# EAGLE board charger_v3 (EAGLE 9.6.1)
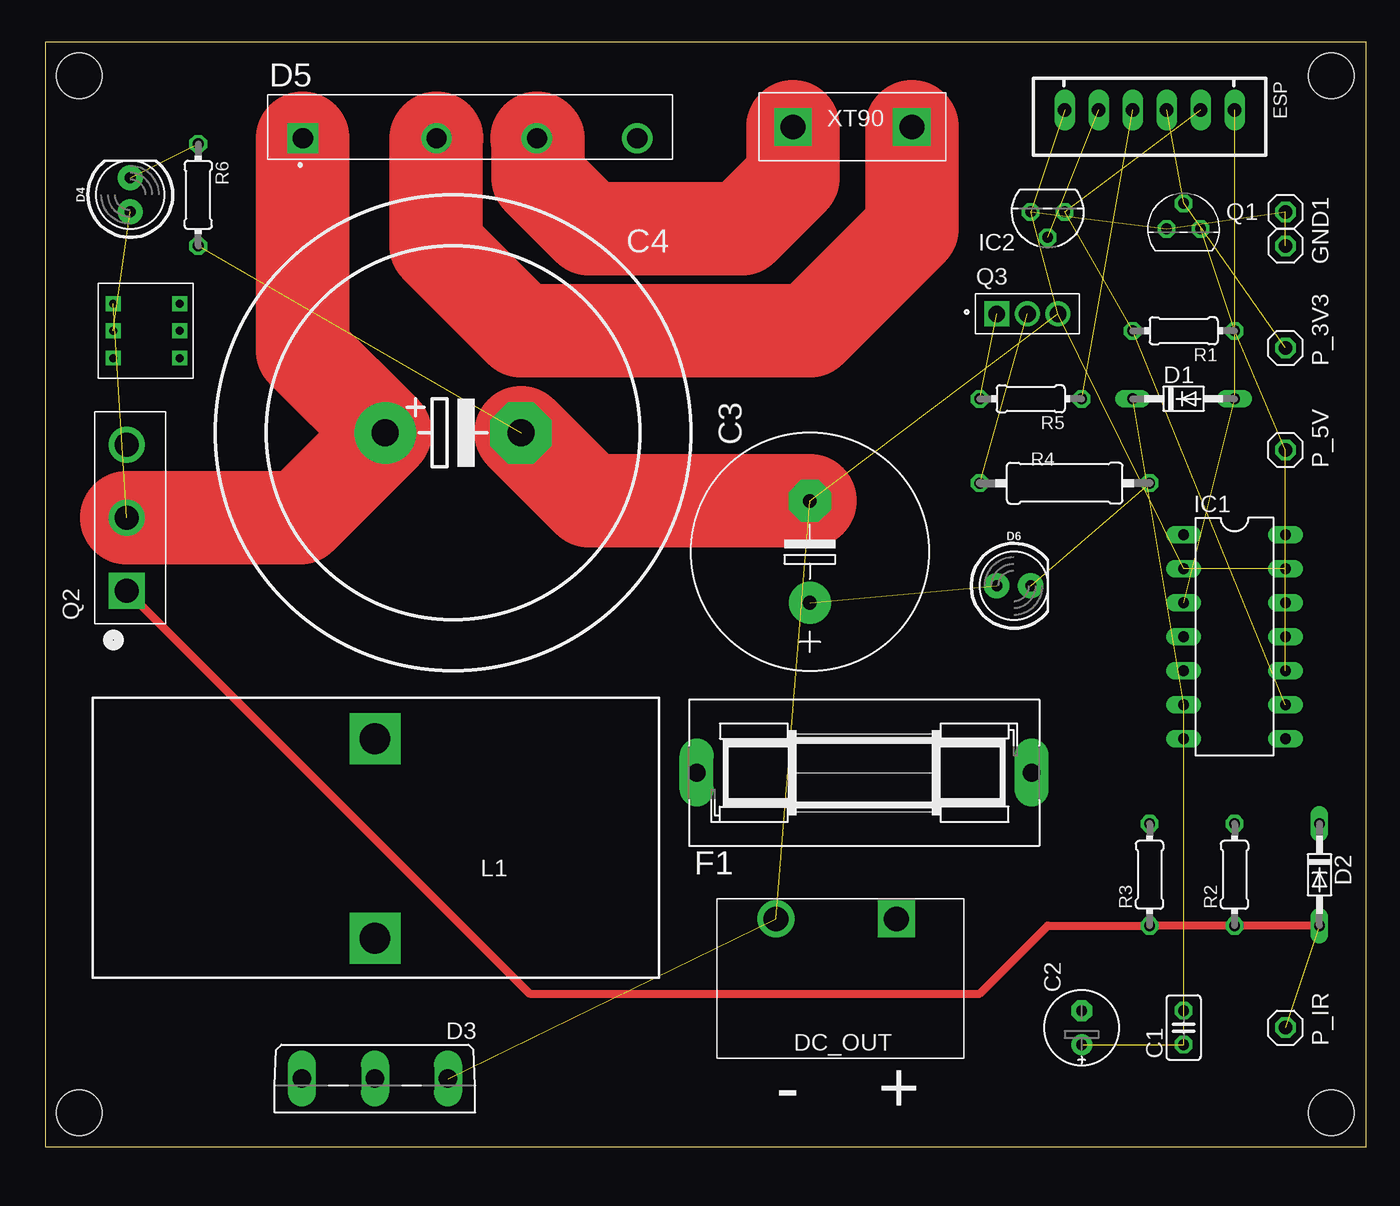
[diagram p0: board, top side]
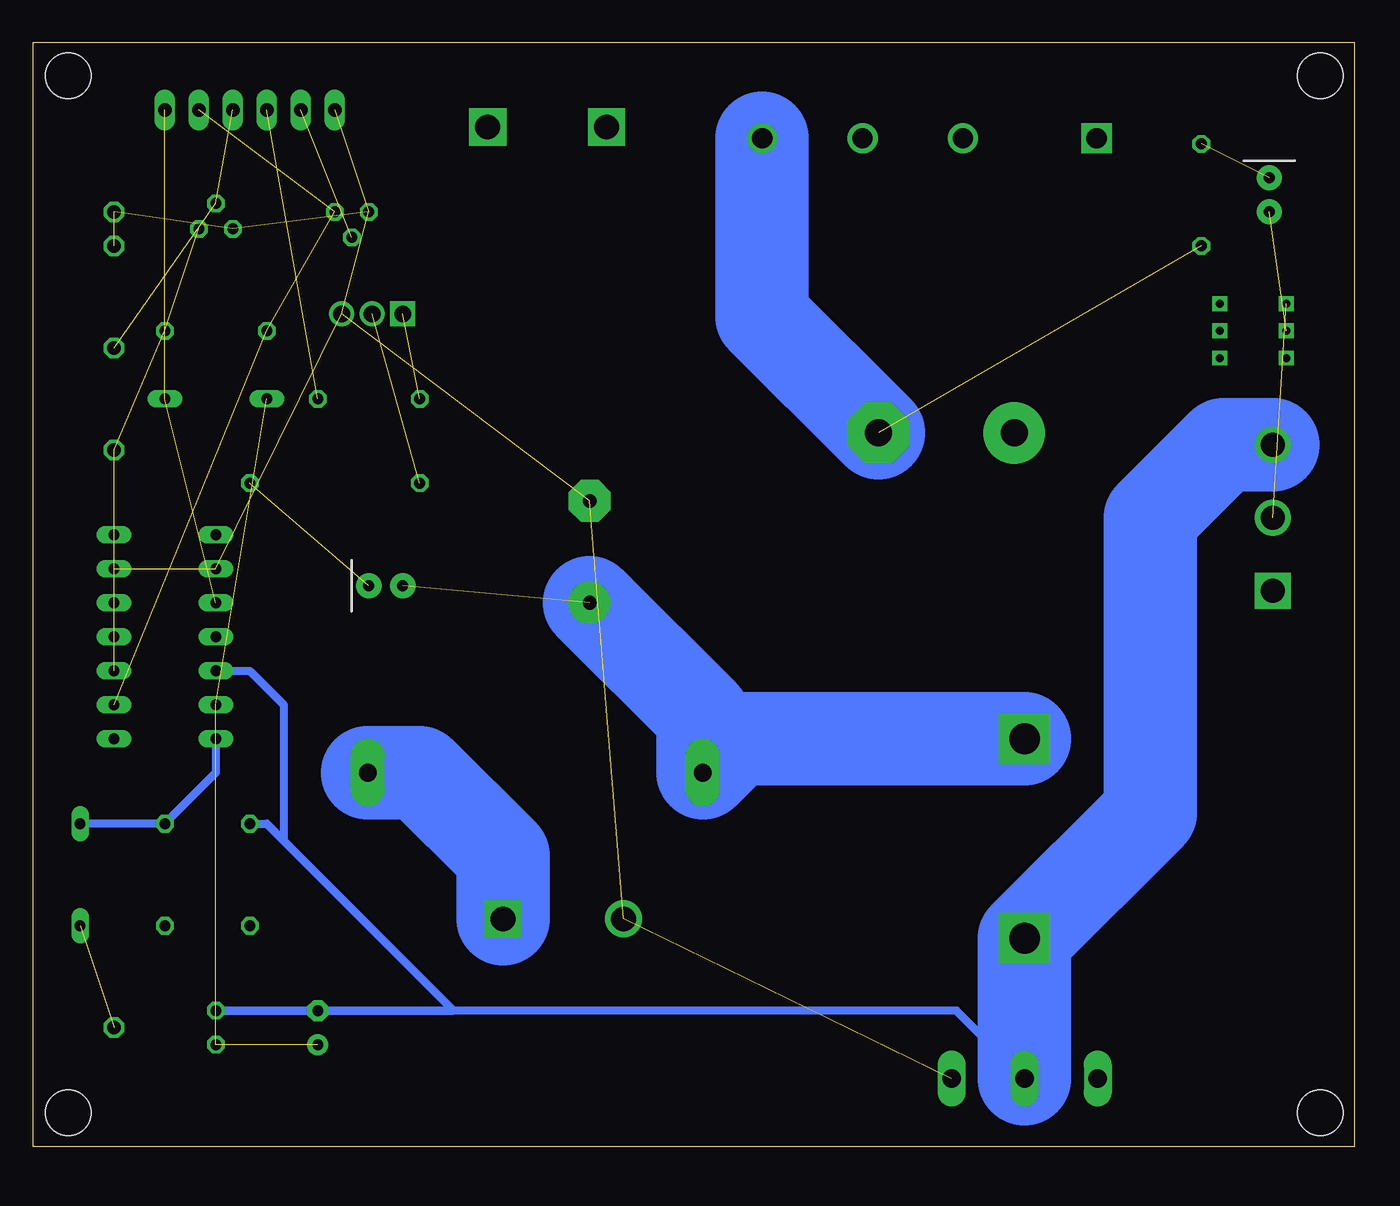
[diagram p1: board, bottom side, seen from below]

Size 98.73 x 82.54 mm. Coordinates in mm from the lower left corner, seen from the top.
Outline: 0,0 98.73,0 98.73,82.54 0,82.54 0,0
Copper layers (1*16): Top 0.035mm / dielectric 1.5mm / Bottom 0.035mm
Design rules "default *": minimum track width 12mil, minimum drill 0.35mm, track to track 12mil, track to pad 12mil, pad to pad 12mil, via to via 12mil, smd to smd 12mil, copper to edge 40mil, drill to drill 6mil, minimum pad ring 10mil, minimum via ring 8mil, stop-mask expansion 4mil, vias tented up to drill 0mil, thermal gap 10mil
Net classes: 0 default: width 0.305 mm; 1 power: width 6.985 mm, clearance 0.508 mm to class 0; 2 pwm_12: width 0.305 mm, clearance 0.508 mm to class 0, clearance 0.508 mm to class 1
Holes 3.4 mm at 2.54,80.01 96.14,80.01 2.54,2.54 96.14,2.54

## Footprints (pad centres in the part's own frame; a part is rotated, then mirrored left to right if it is on the bottom)
XT90-PAD = drill 1.854 square: P$1 0,5.08; P$2 0,-3.81
C025-025X050 = drill 0.813 octagon: 1 -1.27,0; 2 1.27,0
E2,5-6E = drill 0.813 pad 1.575: + -1.27,0 | drill 0.813 pad 1.575 octagon: - 1.27,0
E7,5-18 = drill 1.016 pad 3.15: + -3.81,0 | drill 1.016 pad 3.15 octagon: - 3.81,0
EB35D = drill 2.007 pad 4.597: + -5.08,0 | drill 2.007 pad 4.597 octagon: - 5.08,0
DO34-7 = drill 0.813 long: A 3.81,0; C -3.81,0
SOT93S = drill 1.397 long: A1 -5.461,-2.54; A2 5.461,-2.54; C 0,-2.54
LED_5MM = drill 0.813 pad 1.88: A -1.27,0; K 1.27,0
DIOB_GBJ3510-BP = drill 1.51 pad 2.27 square: 1 -12.5,-0.85 | drill 1.51 pad 2.27: 2 -2.5,-0.85; 3 5,-0.85; 4 12.5,-0.85
TE_1977477-2 = drill 1.85 square: 1 -3.241,-5.334 | drill 1.85: 2 5.781,-5.334
JST-XH-06-PACKAGE-LONG-PAD = drill 1.016 long: 1 -6.35,0; 2 -3.81,0; 3 -1.27,0; 4 1.27,0; 5 3.81,0; 6 6.35,0
SH25 = drill 1.321 pad 2.54 long: 1 -12.522,0; 2 12.522,0
1X01 = drill 1.016 octagon: 1 0,0
DIL14 = drill 0.813 long: 1 -7.62,-3.81; 2 -5.08,-3.81; 3 -2.54,-3.81; 4 0,-3.81; 5 2.54,-3.81; 6 5.08,-3.81; 7 7.62,-3.81; 8 7.62,3.81; 9 5.08,3.81; 10 2.54,3.81; 11 0,3.81; 12 -2.54,3.81; 13 -5.08,3.81; 14 -7.62,3.81
TO92 = drill 0.813 octagon: 1 -1.27,0; 2 0,1.905; 3 1.27,0
TJ7-U1 = drill 2.286 pad 3.81 square: 1 -6.503,4.826; 2 8.408,4.826
TO247AC = drill 1.79 pad 2.69 square: 1 -5.46,0.255 | drill 1.79 pad 2.69: 2 0,0.255; 3 5.46,0.255
TO229P780X300X1364-3 = drill 1.25 square: 1 0,0 | drill 1.25: 2 2.29,0; 3 4.58,0
0204/7 = drill 0.813 octagon: 1 -3.81,0; 2 3.81,0
0309/12 = drill 0.813 octagon: 1 -6.35,0; 2 6.35,0
TL-2230 = drill 0.6 square: 1 -2.032,-2.54; 2 0,-2.54; 3 2.032,-2.54; 4 -2.032,2.413; 5 0,2.413; 6 2.032,2.413

## Placement (x,y rotation side)
AC_IN  XT90A  [XT90-PAD]  59.69,76.2 270 top
C1  100nF  [C025-025X050]  85.09,8.89 90 top
C2  22uF  [E2,5-6E]  77.47,8.89 90 top
C3  150uF  [E7,5-18]  57.15,44.45 90 top
C4  470uF  [EB35D]  30.48,53.34 0 top
D1  UF4007  [DO34-7]  85.09,55.88 0 top
D2  UF4007  [DO34-7]  95.25,20.32 270 top
D3  PBYR3035  [SOT93S]  24.64,2.54 180 top
D4  [LED_5MM]  6.35,71.12 90 top
D5  GBJ3510-BP  [DIOB_GBJ3510-BP]  31.75,76.2 0 top
D6  [LED_5MM]  72.39,41.91 0 top
DC_OUT  1977477-2  [TE_1977477-2]  60.39,11.68 180 top
ESP  JST-XH-06-PIN-LONG-PAD  [JST-XH-06-PACKAGE-LONG-PAD]  82.55,77.47 180 top
F1  [SH25]  61.21,27.94 0 top
GND1  [1X01]  92.71,67.31 0 top
GND2  [1X01]  92.71,69.85 0 top
IC1  IR2110D  [DIL14]  88.9,38.1 270 top
IC2  LM35CZ  [TO92]  74.93,69.85 180 top
L1  1mH  [TJ7-U1]  29.46,22.07 90 top
P_3V3  [1X01]  92.71,59.69 90 top
P_5V  [1X01]  92.71,52.07 90 top
P_IR  [1X01]  92.71,8.89 90 top
Q1  2N7000  [TO92]  85.09,68.58 0 top
Q2  IRFP240  [TO247AC]  6.35,46.99 90 top
Q3  MJE13003G  [TO229P780X300X1364-3]  71.12,62.23 0 top
R1  10k  [0204/7]  85.09,60.96 180 top
R2  10  [0204/7]  88.9,20.32 90 top
R3  1k  [0204/7]  82.55,20.32 90 top
R4  68k  [0309/12]  76.2,49.58 0 top
R5  2.7k  [0204/7]  73.66,55.88 180 top
R6  10k  [0204/7]  11.43,71.12 270 top
U$1  SWITCH-DPDT-7X7A  [TL-2230]  7.62,60.96 270 top

## Library data of the parts
AC_IN U$1 = TA_library
C1-C4 = rcl; SPICEPREFIX: C
D1-D3 = diode
D4 D6 = Sparkfun_LED
D5 = GBJ3510-BP; AVAILABILITY: In Stock; DESCRIPTION: Bridge Rectifier Single Phase Standard 1 kV Through Hole GBJ; MF: Micro Commercial; MP: GBJ3510-BP; PACKAGE: SIP-4 Micro Commercial Co; PRICE: None; PURCHASE-URL: https://pricing.snapeda.com/search/part/GBJ3510-BP/?ref=eda
DC_OUT = terminal_block_TA; AVAILABILITY: In Stock; COMMENT: 1977477-2; DESCRIPTION: Conn Barrier Strip 2 POS 8.25mm Solder ST Thru-Hole 15A/Contact Carton; MF: TE Connectivity; MP: 1977477-2; PACKAGE: None; PRICE: None; PURCHASE-URL: https://pricing.snapeda.com/search/part/1977477-2/?ref=eda
ESP = Rembrandt Electronics - JST XH Connectors v1-0
F1 = fuse; MF: SCHURTER; MPN: 0031.8211; OC_FARNELL: 1162741; OC_NEWARK: 96B9380
GND1 GND2 P_3V3 P_5V P_IR = pinhead
IC1 = irs
IC2 = lm35
L1 = custom_inductor; SPICEPREFIX: L
Q1 = 2N7000; AVAILABILITY: In Stock; DESCRIPTION: N-Channel 60V 350mA (Tc) 1W (Tc) Through Hole TO-92-3; MF: STMicroelectronics; MP: 2N7000; PACKAGE: E-PKG AXIAL-LEADED-2 ON Semiconductor; PRICE: None
Q2 = IRFP240(TO-247); AVAILABILITY: In Stock; DESCRIPTION: N-Channel 200 V 20A (Tc) 150W (Tc) Through Hole TO-247AC; MF: Vishay Siliconix; MP: IRFP240; PACKAGE: TO-247 Vishay Siliconix; PRICE: None
Q3 = MJE13003G; AVAILABILITY: Not in stock; DESCRIPTION: Bipolar (BJT) Transistor NPN 400 V 1.5 A 10MHz 1.4 W Through Hole TO-126; MF: ON Semiconductor; MP: MJE13003G; PACKAGE: TO-126 ON Semiconductor; PRICE: None
R1-R6 = rcl; SPICEPREFIX: R

## Nets
5V: ESP.2 IC1.9 IC2.1 R1.2
12V: D1.A ESP.1 IC1.3
AC_1 [power]: AC_IN.P$1 D5.2
AC_2 [power]: AC_IN.P$2 D5.3
GND: C3.- C4.- D3.A1 D5.4 DC_OUT.2 ESP.6 GND1.1 GND2.1 IC1.2 IC1.11 IC1.12 IC1.13 IC2.3 Q1.1 Q3.3 R6.2
HVDC: C4.+ D5.1 Q2.2 U$1.1
N$1: D2.C IC1.7 R2.2
N$2: D4.A U$1.2
N$3: Q3.2 R4.1
N$4: D6.K R4.2
N$5: Q3.1 R5.2
N$8: D4.K R6.1
NMOS_SOURCE: C1.2 C2.- D3.C IC1.5 L1.1 Q2.3 R3.2
PWM_5V: IC1.10 P_5V.1 Q1.3 R1.1
PWM_12V [pwm_12]: D2.A P_IR.1 Q2.1 R2.1 R3.1
PWM_SW1: ESP.3 P_3V3.1 Q1.2
PWM_SW2: ESP.4 R5.1
TEMP: ESP.5 IC2.2
V_OUT: C3.+ D6.A F1.1 L1.2
V_OUT_FUSE [power]: DC_OUT.1 F1.2
VB: C1.1 C2.+ D1.C IC1.6

## Tracks (layer width: path | path; a pad name or v marks a point on that pad's centre or on a via)
5V  (3 unrouted)
12V  (2 unrouted)
AC_1
  Top 6.985: D5.2 29.21,75.31 29.21,67.31 35.56,60.96 57.15,60.96 64.77,68.58 AC_IN.P$1
AC_2
  Top 6.985: D5.3 36.83,75.27 36.83,72.39 40.64,68.58 52.07,68.58 55.88,72.39 AC_IN.P$2
GND  (13 unrouted)
  Top 6.985: C4.- 40.64,48.26 C3.-
  Bottom 6.985: D5.4 44.25,62.03 C4.-
HVDC  (1 unrouted)
  Top 6.985: D5.1 19.25,59.49 C4.+ 19.05,46.99 Q2.2
N$1
  Bottom 0.61: IC1.7 85.09,27.94 R2.2 D2.C
N$2  (1 unrouted)
N$3  (1 unrouted)
N$4  (1 unrouted)
N$5  (1 unrouted)
N$6
  pour Bottom: 22.86,29.21 22.86,31.75 22.86,33.02 26.67,33.02 26.67,27.94 22.86,27.94
N$8  (1 unrouted)
NMOS_SOURCE
  Bottom 0.61: IC1.5 82.55,35.56 80.01,33.02 80.01,22.86 | R3.2 81.28,24.13 80.01,22.86 | 80.01,22.86 67.31,10.16 C1.2 C2.- 29.72,10.16 D3.C
  Bottom 6.985: Q2.3 9.78,52.45 15.24,46.99 15.24,24.97 L1.1 D3.C
PWM_5V  (3 unrouted)
PWM_12V  (1 unrouted)
  Top 0.61: D2.A R2.1 R3.1 74.93,16.51 69.85,11.43 36.2,11.43 Q2.1
PWM_SW1  (2 unrouted)
PWM_SW2  (1 unrouted)
TEMP  (1 unrouted)
V_OUT  (1 unrouted)
  Bottom 6.985: L1.2 46.15,30.48 F1.1 48.69,32.18 C3.+
V_OUT_FUSE
  Bottom 6.985: F1.2 69.85,27.94 63.63,21.72 DC_OUT.1
VB  (3 unrouted)

## Text on the board
tPlace: - | +